# EAGLE board RELAY_BRD_V2 (EAGLE 7.6.0)
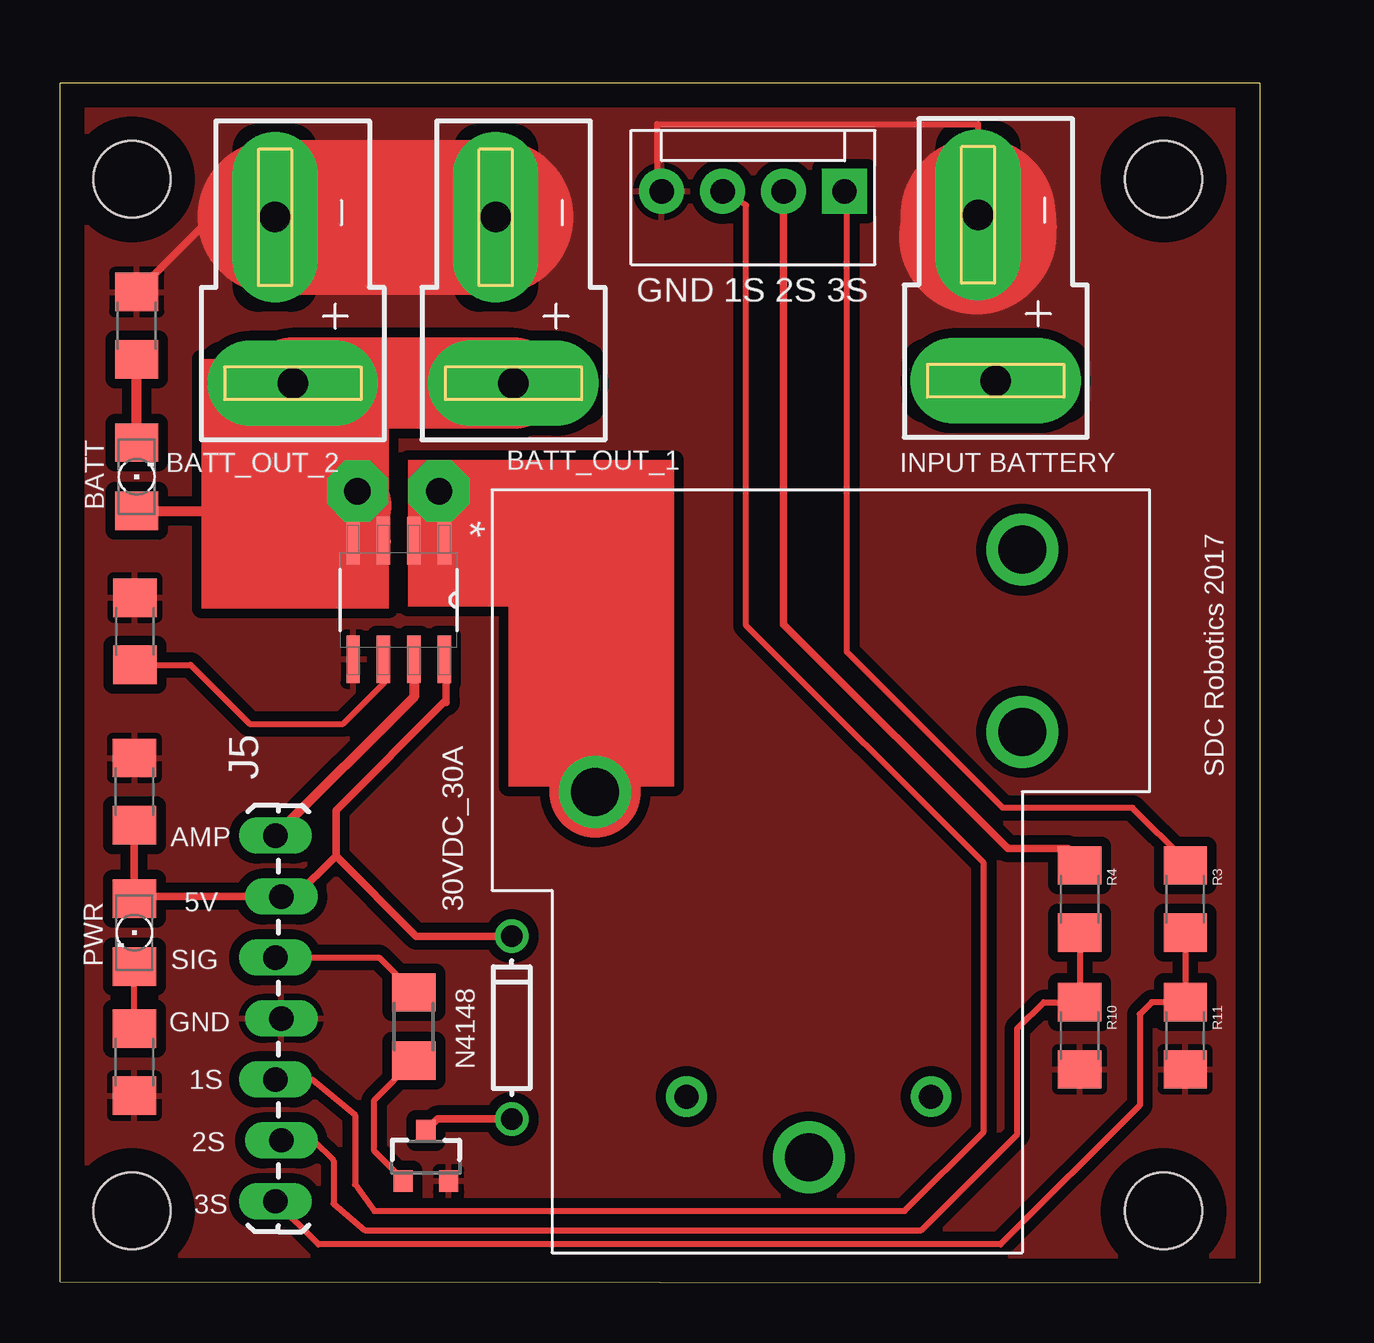
[diagram p0: board, top side]
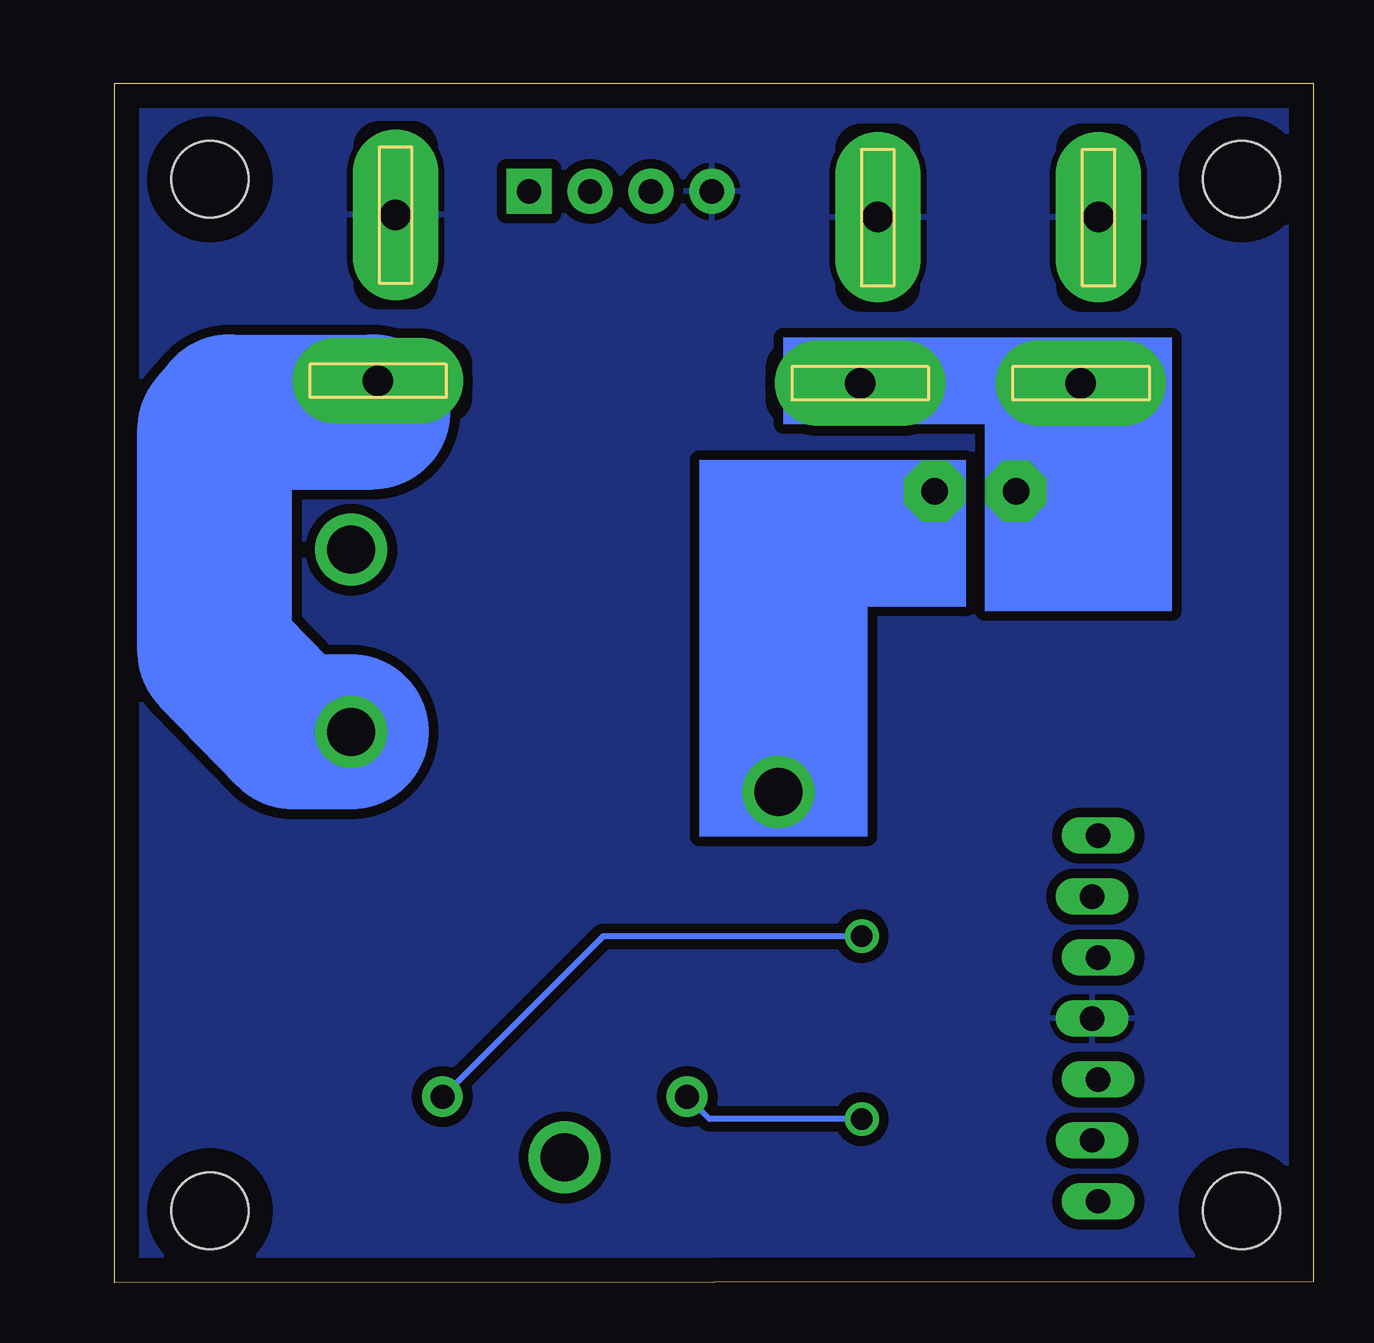
[diagram p1: board, bottom side, seen from below]

Size 50 x 50 mm. Coordinates in mm from the lower left corner, seen from the top.
Outline: 0,0.05 50,0 50,50 0,50 0,0.05
Copper layers (1*16): Top 0.035mm / dielectric 1.5mm / Bottom 0.035mm
Design rules "default *": minimum track width 10mil, minimum drill 24mil, track to track 16mil, track to pad 16mil, pad to pad 8mil, via to via 8mil, smd to smd 8mil, copper to edge 40mil, drill to drill 8mil, minimum pad ring 10mil, minimum via ring 8mil, stop-mask expansion 4mil, vias tented up to drill 0mil, thermal gap 10mil
Holes 3.2 mm at 3,46 46,46 46,3 3,3

## Footprints (pad centres in the part's own frame; a part is rotated, then mirrored left to right if it is on the bottom)
6P-19.8H = drill 1 pad 1.7: 1 -9.4,-4.6; 3 -9.4,5.6 | drill 2 pad 3: 2 -11.94,0.5; 4 3.3,9.4; 5 13.4,-8.4; 6 5.8,-8.4
LED_1206 = smd 1.6 x 1.803: A -1.422,0; C 1.422,0
1206 = smd 1.6 x 1.8: 1 -1.4,0; 2 1.4,0
DO-1N4148 = drill 0.9: A -3.81,0; C 3.81,0
DEANS = drill 1.27 pad 3.556 long: + 0,0; - 0.737,-6.921
MOLEX-1X4 = drill 1.016 pad 1.88 square: 1 0,0 | drill 1.016 pad 1.88: 2 2.54,0; 3 5.08,0; 4 7.62,0
1X07_LOCK_LONGPADS = drill 1.016 long: 1 0,0.127; 2 2.54,-0.127; 3 5.08,0.127; 4 7.62,-0.127; 5 10.16,0.127; 6 12.7,-0.127; 7 15.24,0.127
SOT23-3 = smd 0.8 x 0.9: 1 -0.95,-1; 2 0.95,-1; 3 0,1.1
R1206 = smd 1.6 x 1.803: 1 -1.422,0; 2 1.422,0
SOIC127P600X175-8N = smd 1.981 x 0.559: 1 -2.464,1.905; 2 -2.464,0.635; 3 -2.464,-0.635; 4 -2.464,-1.905; 5 2.464,-1.905; 6 2.464,-0.635; 7 2.464,0.635; 8 2.464,1.905

## Placement (x,y rotation side)
30VDC_30A  [6P-19.8H]  31.71,17.16 90 top
BATT  [LED_1206]  3.2,33.6 90 top
C1  1nF  [1206]  3.12,27.16 90 top
C2  100nF  [1206]  3.11,20.48 90 top
D3  N4148  [DO-1N4148]  18.83,10.64 90 top
J1  BATTERY_CONNDEANS  [DEANS]  39,37.6 180 top
J3  [MOLEX-1X4]  32.7,45.5 180 top
J4  BATTERY_CONNDEANS  [DEANS]  18.9,37.5 180 top
J5  [1X07_LOCK_LONGPADS]  9.1,3.4 90 top
J8  BATTERY_CONNDEANS  [DEANS]  9.7,37.5 180 top
PWR  [LED_1206]  3.1,14.6 270 top
Q1  MMBT2222A  [SOT23-3]  15.25,5.24 0 top
R1  1k  [1206]  3.2,39.9 90 top
R2  330  [1206]  3.1,9.2 270 top
R3  330K  [1206]  46.9,16 270 top
R4  270K  [1206]  42.5,16 270 top
R6  510  [R1206]  14.75,10.69 90 top
R10  100K  [1206]  42.5,10.3 270 top
R11  100K  [1206]  46.9,10.3 270 top
U1  ACS712-30A  [SOIC127P600X175-8N]  14.12,28.46 270 top

## Library data of the parts
30VDC_30A = Grove ®C SPDT Relay(30A) v1.0
BATT PWR = eagle-ltspice; SPICEMODEL: NONE; SPICEPREFIX: D; SPICETYPE: diode
C1 C2 = SparkFun-Capacitors
D3 = adafruit
J1 J3-J5 J8 = SparkFun-Connectors
Q1 = SparkFun-DiscreteSemi; PROD_ID: TRANS-08049
R1-R4 R10 R11 = SparkFun-Resistors
R6 = eagle-ltspice; SPICEMODEL: NONE; SPICEPREFIX: R
U1 = Allegro_By_element14_Batch_1; MPN: ACS712ELCTR-20A-T; OC_FARNELL: 1329624; OC_NEWARK: 31M3133; PACKAGE: SOIC-8; SUPPLIER: Allegro

## Nets
5V: 30VDC_30A.1 C2.1 D3.C J5.6 PWR.A U1.8
11.1V_BATTERY: 30VDC_30A.6 J1.+
CURRENT_SENSE: J5.7 U1.7
GND: C1.2 C2.2 J1.- J3.4 J4.- J5.4 J8.- Q1.2 R1.2 R2.2 R10.2 R11.2 U1.5
N$19: BATT.C R1.1
N$20: J5.5 R6.2
N$21: PWR.C R2.1
N$22: Q1.1 R6.1
N$23: 30VDC_30A.3 D3.A Q1.3
N$24: J3.1 R3.1
N$26: BATT.A J4.+ J8.+ U1.3 U1.4
N$27: J3.2 R4.1
N$68: C1.1 U1.6
N$69: J3.3 J5.3
N$70: 30VDC_30A.4 U1.1 U1.2
N$84: J5.2 R4.2 R10.1
N$85: J5.1 R3.2 R11.1

## Tracks (layer width: path | path; a pad name or v marks a point on that pad's centre or on a via)
5V
  Top 0.305: 3.13,19.1 C2.1 3.1,18.98 PWR.A 3.18,16.1 J5.6 9.8,16.1 11.5,17.8 | 16.1,24.2 16.1,24.3 | 16.1,24.3 16.1,26.62 U1.8 | 11.5,17.8 11.5,19.7 16.1,24.3 | D3.C 14.85,14.45 11.5,17.8
  Bottom 0.254: D3.C 29.63,14.45 30VDC_30A.1
11.1V_BATTERY
  Bottom 1.27: 39.2,36.3 39.2,37.4 J1.+
  Bottom 6.452: 30VDC_30A.6 42.56,22.96 45.8,26.3 45.8,35.6 45.2,36.3 39.2,36.3
CURRENT_SENSE
  Top 0.406: U1.7 14.76,24.42 J5.7
GND
  Top 0.254: J3.4 24.9,45.9 24.9,48.3 38.26,48.3 J1.-
  Top 0.305: J8.- 6.12,44.22 R1.2 | 36.61,43.64 36.7,43.7
  Top 1.27: 38.2,43.6 36.7,43.6 36.63,43.67 36.63,43.66 36.61,43.64
  Top 6.452: J8.- J4.- | J1.- 38.32,43.72 38.2,43.6
  pour Top: -1.6,52.3 52.3,52.1 52.3,-2.4 -1.6,-2.2
  pour Bottom: -3.1,51.3 52.2,51.3 52.2,-5.4 -3.1,-5.4 -3.1,51.2
N$19
  Top 0.406: BATT.C R1.1
N$20
  Top 0.254: J5.5 13.3,13.56 R6.2
N$21
  Top 0.254: R2.1 PWR.C
N$22
  Top 0.254: Q1.1 14.3,4.3 13.1,5.5 13.1,7.62 R6.1
N$23
  Top 0.305: D3.A 15.73,6.83 Q1.3
  Bottom 0.254: D3.A 25.17,6.83 30VDC_30A.3
N$24
  Top 0.254: R3.1 46.9,17.6 44.7,19.8 39.3,19.8 32.8,26.3 32.8,45.8 J3.1
N$26
  Top 0.254: 13.49,30.9 U1.3 | 12.4,31.6 U1.4
  Top 0.406: BATT.A 8.58,32.18 10.35,33.95
  Top 0.61: 13.49,30.9 12.34,30.9 U1.4
  Top 1.27: 12.4,31.6 12.4,31.3 13.1,30.6 12.1,30.6 12.1,31 12.3,31.2 12.3,32 11.9,32.4
  Top 3.81: 11.9,32.4 10.35,33.95 9.7,34.6 J8.+ J4.+
N$27
  Top 0.305: J3.2 30.16,27.44 39.5,18.1 42,18.1 R4.1
N$68
  Top 0.254: C1.1 5.44,25.76 7.9,23.3 11.8,23.3 13.5,25 13.5,25.98 U1.6
N$69
  Top 0.254: J5.3 10.52,8.48 12.3,7 12.3,4.1 13.1,3 35.2,3 38.5,6.3 38.5,17.5 28.6,27.4 28.6,44.92 J3.3
N$70
  Top 0.254: 15.21,31.2 U1.2 U1.1
  Top 1.27: 16.7,32.1 16.3,31.9 U1.1
  Top 3.81: 30VDC_30A.4 22.31,29.39 19.8,32.1 16.7,32.1
N$81  (via drill 1.1 pad 2.54)
  other vias: 12.4,33
N$84
  Top 0.254: R4.2 R10.1 41,11.7 39.9,10.6 39.9,6.2 35.9,2.2 12.7,2.2 11.4,3.3 11.4,5.1 10.56,5.94 J5.2
N$85
  Top 0.254: R3.2 R11.1 45.5,11.7 45,11.2 45,7.4 39.2,1.6 10.77,1.6 J5.1
N$86  (via drill 1.1 pad 2.54)
  other vias: 15.8,33
(copper drawn outside any net)
  shapes: Bottom area x4, Top area x3

## Text on the board
tNames: GND 1S 2S 3S | BATT_OUT_2 | BATT_OUT_1 | INPUT BATTERY | SDC Robotics 2017 | AMP | 5V | SIG | GND | 1S | 2S | 3S